# Altium PCB Fluxus.PcbDoc
Units mil, origin at the board's own origin, x right, y up, seen from the top; angles counter-clockwise.
Board outline 1181.1 x 1102.36 mil, 2 copper layers (Top Layer, Bottom Layer), stack 62.2 mil thick; 36 components, 29 nets, 141 pads, 41 vias.
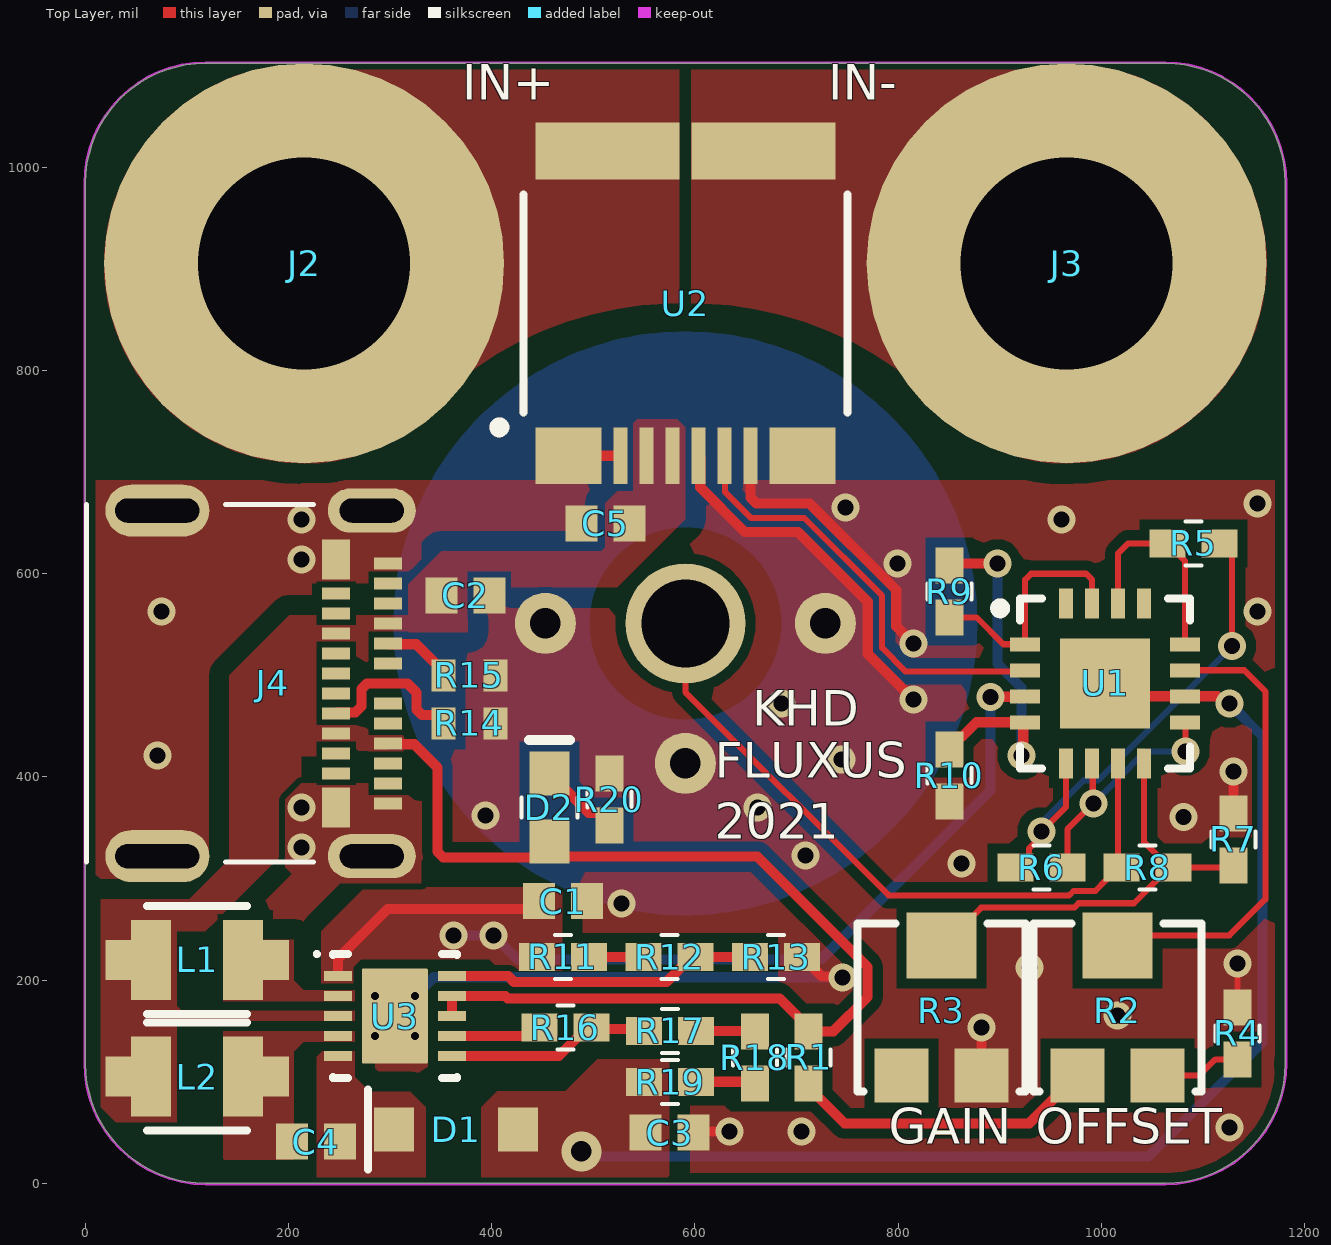
[diagram p0: Top Layer view]
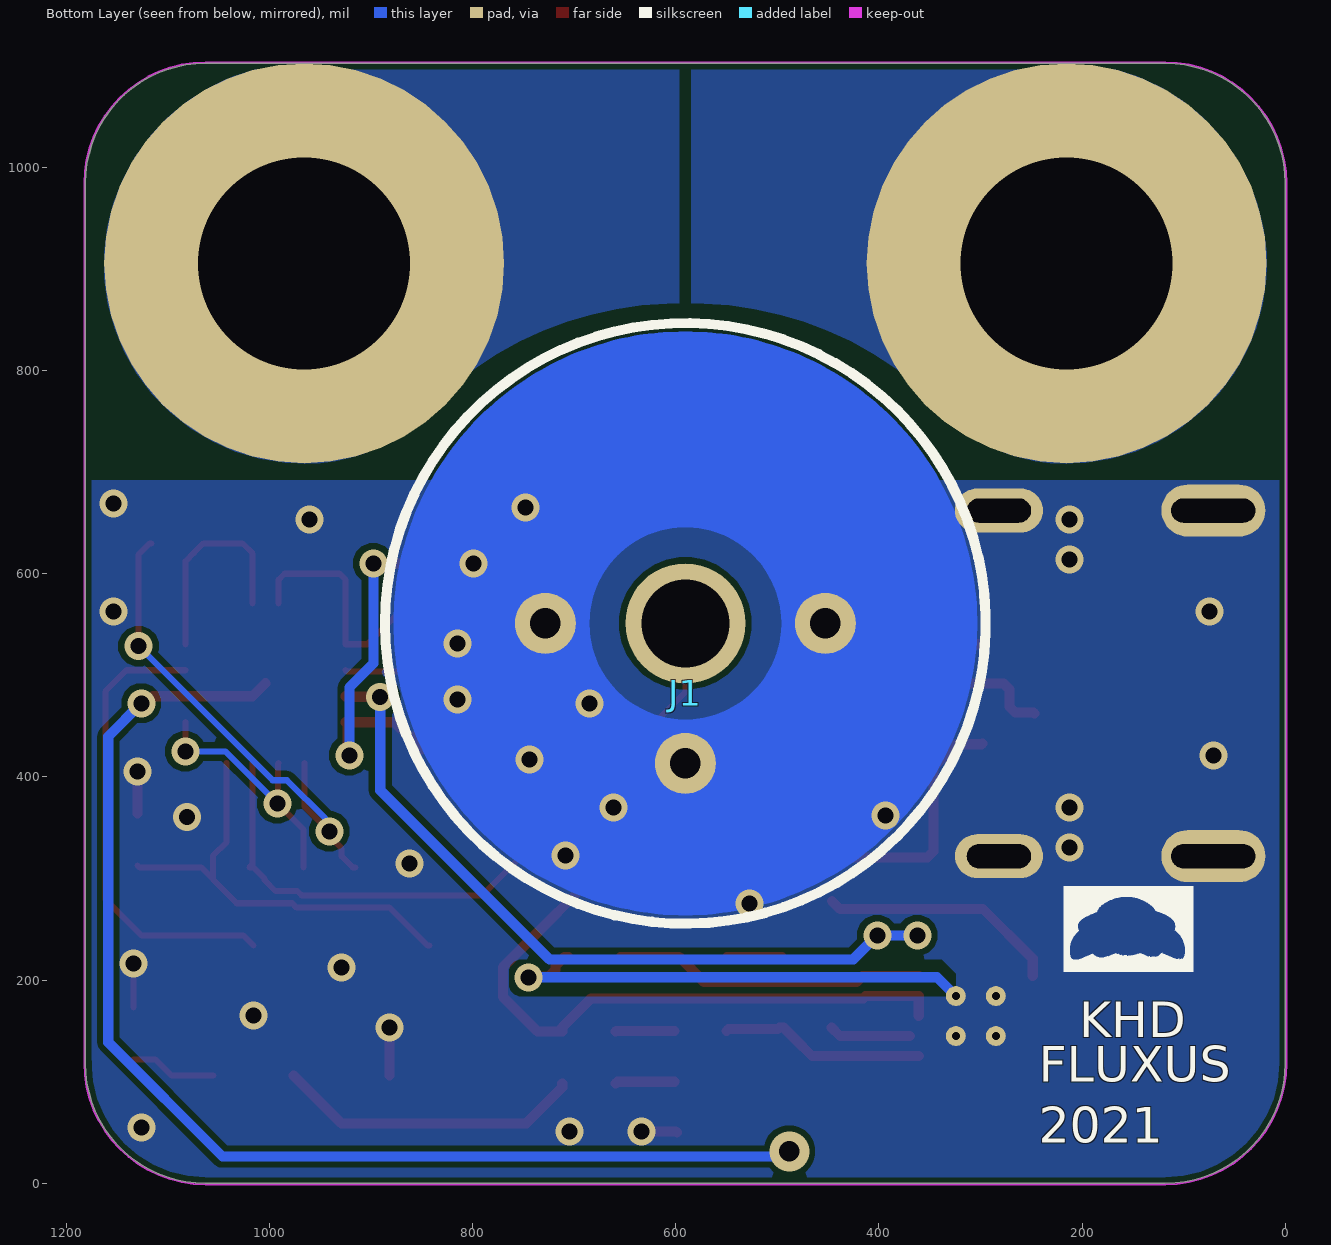
[diagram p1: Bottom Layer view, seen from below]
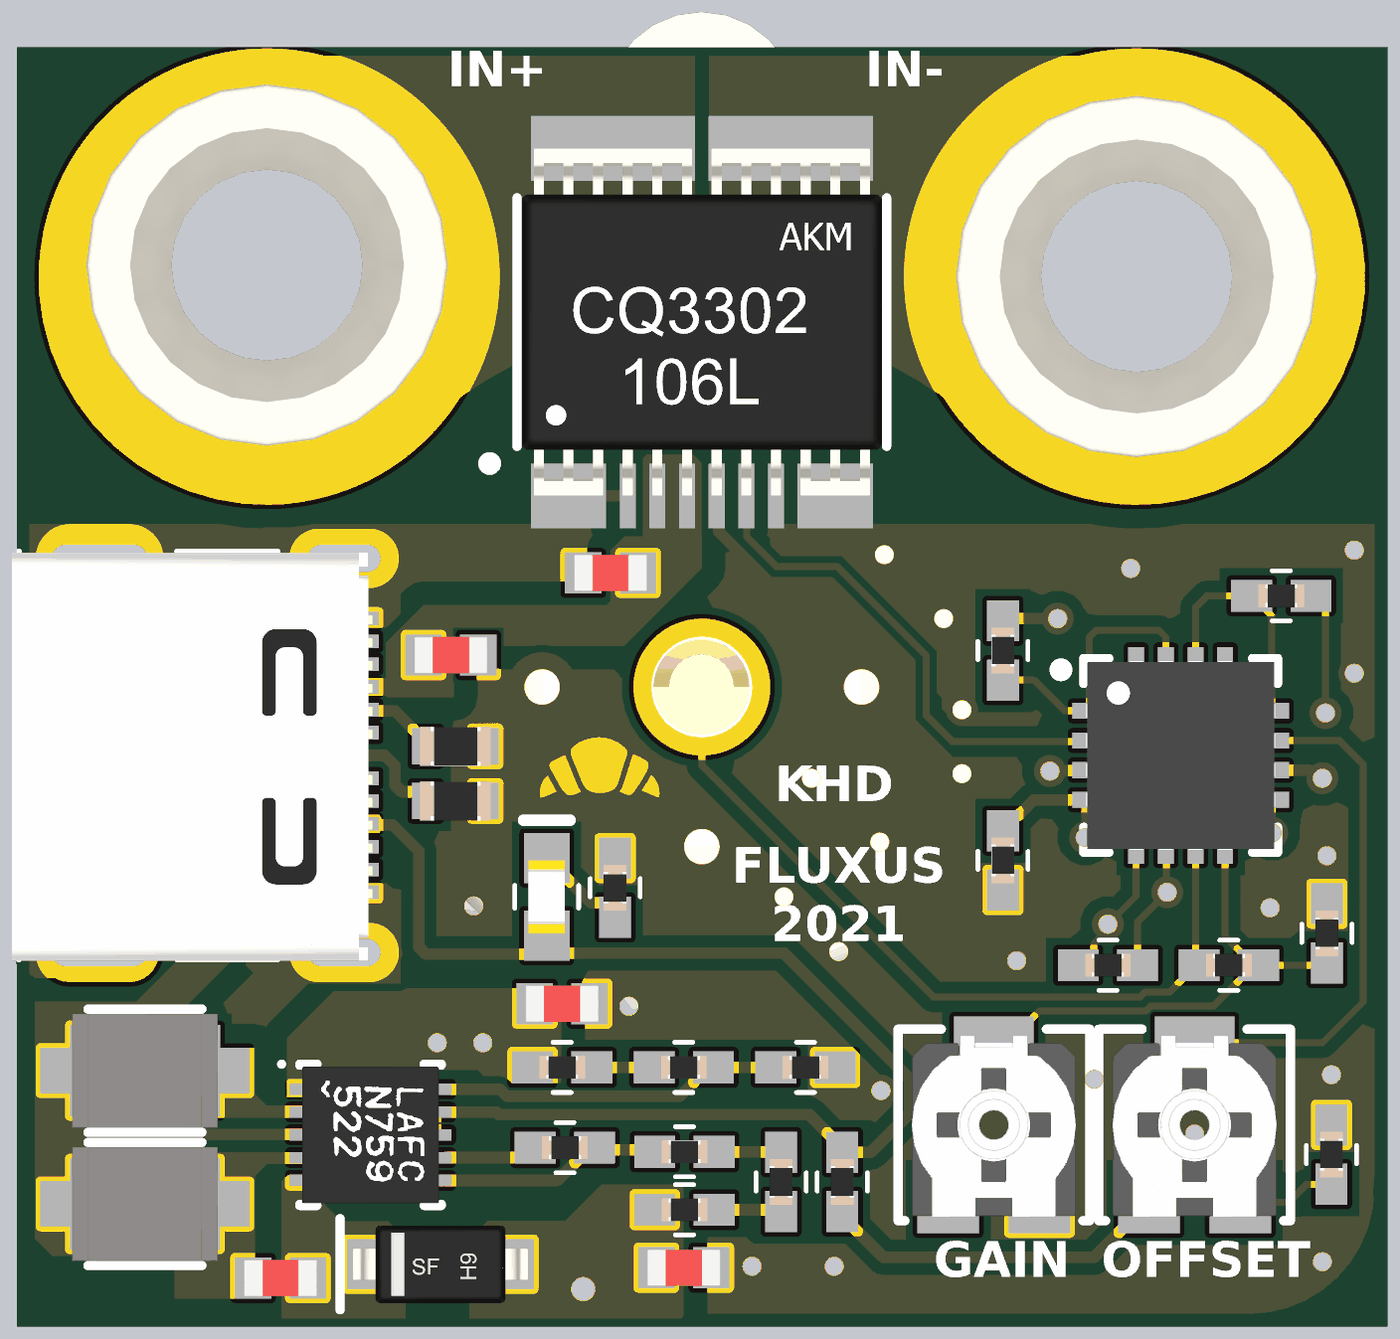
[diagram p2: 3D render of the assembled board from above, using the file's embedded part models]

## Layer stack, top to bottom
Top Solder: solder mask 0.4, Solder Resist, Dk 3.5
Top Layer: signal copper 1.4
Dielectric 1: dielectric 59.4, FR-4, Dk 4.8
Bottom Layer: signal copper 1.4
Bottom Solder: solder mask 0.4, Solder Resist, Dk 3.5

## Board outline
1062.99,0 ccw(c1062.99,118.11) 1181.1,118.11 1181.1,984.25 ccw(c1062.99,984.25) 1062.99,1102.36 118.11,1102.36 ccw(c118.11,984.25) 0,984.25 0,118.11 ccw(c118.11,118.11) 118.11,0

## Design rules (kind name [scope] priority, off if disabled: settings)
Clearance Clearance_1 [InNamedPolygon('GND_TOP')] p1: gap=10 ignorepadtopadclearanceinfootprint=FALSE except(0: Arc-Hole Track-Hole SMDPad-Hole THPad-Hole Via-Hole Fill-Hole Poly-Hole Region-Hole Text-Hole; 20: Fill-Fill Fill-Poly Fill-Region Poly-Poly Poly-Region Region-Region)
Clearance [All] p2: gap=6 ignorepadtopadclearanceinfootprint=TRUE
Height [All] p1 off: minheight=0 maxheight=1000 prefheight=500
MinimumSolderMaskSliver [All] p1 off: minsoldermaskwidth=10
PlaneClearance [InNamedPolygon('GND_TOP')] p1: clearance=20
PolygonConnect PolygonConnect_1 [All vs IsNamedPolygon('GND_TOP')] p1: connectstyle=Direct reliefconductorwidth=10 reliefentries=4 polygonreliefangle="90 Angle" airgapwidth=10
PolygonConnect [All] p2: connectstyle=Direct reliefconductorwidth=10 reliefentries=4 polygonreliefangle="90 Angle" airgapwidth=10
RoutingVias [All] p1: holewidth=20.12 width=39.37 viastyle="Through Hole" minholewidth=15.75 minwidth=27.56 maxholewidth=28 maxwidth=50
SolderMaskExpansion [All] p1: expansion=4 istentingtop=FALSE
Width [All] p1: maxlimit=393.7 minlimit=6 preferedwidth=10
27 further rules are at their usual default settings.

## Components (designator, comment, footprint, x,y, rotation, side; value= is the part's Value field where it differs from the comment)
C1 "C0603 0.47uF 50V X7R" C0603-HIGH-DENSITY 470,277.87 r180 top value=0.47uF
C2 "C0603 1uF 25V X7R" C0603-HIGH-DENSITY 374.02,578.74 r180 top value=1uF
C3 "C0603 0.47uF 50V X7R" C0603-HIGH-DENSITY 575,50 r180 top value=0.47uF
C4 "C0603 100nF 50V X7R" C0603-HIGH-DENSITY 227,41 r0 top value=100nF
C5 "C0603 0.47uF 50V X7R" C0603-HIGH-DENSITY 511.81,649.61 r0 top value=0.47uF
D1 "B0540WQ-7-F" SOD123W 365,53 r0 top
D2 "LED 0603 Green" LED0603-IPC 456.69,370.08 r270 top
J1 "112420" "BNC_Plug, Male Pin Panel Mount" 590.55,551.18 r90 bottom locked
J2 "IN+" "Banana Jack"#1 215.35,915.35 r180 top
J3 "IN-" "Banana Jack"#2 965.75,905.51 r180 top
J4 "USB C" "Molex USB-C" 149.61,492.13 r270 top locked
L1 "LQH32CN100K33L" "LQH32C L1210" 110,220 r0 top value=10uH
L2 "LQH32CN100K33L" "LQH32C L1210" 110,105 r0 top value=10uH
R1 "R0402 10k 1%" R0402-IPC 711.79,124 r90 top value=10k
R2 "OFFSET" POT3.25-2 1015.75,169.29 r90 top value=2k
R3 "GAIN" POT3.25-2 842.52,169.29 r90 top value=2k
R4 "R0402 10k 1%" R0402-IPC 1133.86,147.64 r270 top value=10k
R5 "R0402 10k 1%" R0402-IPC 1090.55,629.92 r0 top value=10k
R6 "R0402 10k 1%" R0402-IPC 940.94,311.02 r180 top value=10k
R7 "R0402 1k 1%" R0402-IPC 1129.92,338.58 r270 top value=1k
R8 "R0402 10k 1%" R0402-IPC 1045.28,311.02 r180 top value=10k
R9 "R0402 10k 1%" R0402-IPC 850.39,582.68 r90 top value=10k
R10 "R0402 10k 1%" R0402-IPC 850.39,401.57 r270 top value=10k
R11 "R0402 10k 1%" R0402-IPC 470,222.87 r180 top value=10k
R12 "R0402 1k 1%" R0402-IPC 575,222.87 r180 top value=1k
R13 "R0402 1k 1%" R0402-IPC 680,222.87 r180 top value=1k
R14 "R0603 5.1K 1%" R0603-HIGH-DENSITY 377.95,452.76 r180 top value=5.1k
R15 "R0603 5.1K 1%" R0603-HIGH-DENSITY 377.95,500 r180 top value=5.1k
R16 "R0402 1k 1%" R0402-IPC 472.44,153.54 r180 top value=1k
R17 "R0402 1k 1%" R0402-IPC 575.59,150 r180 top value=1k
R18 "R0402 1k 1%" R0402-IPC 659,124 r90 top value=1k
R19 "R0402 10k 1%" R0402-IPC 575.59,100 r180 top value=10k
R20 "R0402 1k 1%" R0402-IPC 515.75,377.95 r270 top value=1k
U1 "ADA4610-4ACPZ-R7" "LFCSP16 4x4x0.75mm" 1003.74,492.2 r0 top
U2 "CQ3302" "24-LSSOP CQ3302 Specific" 590.55,866.14 r90 top
U3 "LT3463EDD#PBF" DFN-10 304.69,164.69 r0 top

## Footprints (in the part's own frame and the unit in brackets; to place one, negate y for a bottom-side part, rotate by r counter-clockwise, add the part's x,y. Pads: shape width x height; smd on the part's side, far side on the other; paste and mask are expansions set on the pad)
"24-LSSOP CQ3302 Specific" [mm] "24-LSSOP, 10-Leads, Body 7.90x5.60mm, Pitch 0.65mm"
  rect 1.42x1.65 smd paste+0 mask+0: 1(-3.81,2.925) 8(-3.81,-2.925)
  rect 1.42x0.35 smd paste+0 mask+0: 2(-3.81,1.625) 3(-3.81,0.975) 4(-3.81,0.325) 5(-3.81,-0.325) 6(-3.81,-0.975) 7(-3.81,-1.625)
  rect 1.42x3.6 smd paste+0 mask+0: 9(3.81,-1.95) 10(3.81,1.95)
  silkscreen extent -3.22,-4.05 2.73,4.77, body extent -3.8,-3.95 3.8,3.95, height 1.4
"Banana Jack"#1 [mm] "JACK NON-INSULATED .350\""
  round 10 hole 5.3: 1(0,0.25)
  body extent -3.96,-3.96 3.96,3.96, height 2.37
"Banana Jack"#2 [mm] "JACK NON-INSULATED .350\""
  round 10 hole 5.3: 1(0,0)
  body extent -3.96,-3.96 3.96,3.96, height 2.37
"BNC_Plug, Male Pin Panel Mount" [mil] "BNC Connector Plug, Male Pin 50Ohm Panel Mount Solder Cup"
  round 118.11 hole 86.61: C(0,0)
  round 60 hole 30 mask+4: G(-137.8,0) G(-0.01,-137.8) G(0,137.8)
  Top Layer circle w192.91: c0,0 r190.94
  silkscreen extent -296,-295 296,296, body extent -289,-285 583,284, height 1016
C0603-HIGH-DENSITY [mm] "Chip Capacitor, 2-Leads, Body 1.60x0.80mm, IPC High Density"
  rect 0.8x0.9 smd: 1(-0.6,0) 2(0.6,0)
  body extent -0.8,-0.4 0.8,0.4, height 0.3
DFN-10 [mm] "10-LEAD (3mm × 3mm) PLASTIC DFN (10-WFDFN)"
  rect 0.7x0.25 smd mask+0.102: 1(-1.425,1) 2(-1.425,0.5) 3(-1.425,0) 4(-1.425,-0.5) 5(-1.425,-1) 6(1.425,-1) 7(1.425,-0.5) 8(1.425,0) 9(1.425,0.5) 10(1.425,1)
  round 0.5 hole 0.2: 11(-0.5,-0.5) 11(-0.5,0.5) 11(-0.5,0.5) 11(0.5,-0.5) 11(0.5,0.5)
  rrect5% 1.65x2.38 smd mask+0.102: 11(0,0)
  silkscreen extent -2,-1.55 1.55,1.6, body extent -1.5,-1.5 1.5,1.5, height 0.75
LED0603-IPC [mm]
  rect 1.1x1 smd: A(0.85,0) K(-0.85,0)
  silkscreen extent -1.68,-0.7 0.25,0.7, body extent -0.8,-0.4 0.8,0.4, height 1.1
"LFCSP16 4x4x0.75mm" [mm] "16-Lead Lead Frame Chip Scale Package"
  rect 0.75x0.35 smd: 1(-2,0.975) 2(-2,0.325) 3(-2,-0.325) 4(-2,-0.975) 9(2,-0.975) 10(2,-0.325) 11(2,0.325) 12(2,0.975)
  rect 0.35x0.75 smd: 5(-0.975,-2) 6(-0.325,-2) 7(0.325,-2) 8(0.975,-2) 13(0.975,2) 14(0.325,2) 15(-0.325,2) 16(-0.975,2)
  rect 2.25x2.25 smd paste-1.3: 17(0,0)
  silkscreen extent -2.75,-2.12 2.12,2.12, body extent -2.07,-2.07 2.07,2.07, height 0.8
"LQH32C L1210" [mm] "Murata LQH32C Series Inductors"
  rect 0.65x1 smd: 1(-1.97,0) 2(1.97,0)
  rect 1x2 smd: 1(-1.15,0) 2(1.15,0)
  silkscreen extent -1.25,-1.35 1.25,1.35, body extent -1.6,-1.25 1.6,1.25, height 2.2
"Molex USB-C" [mm] "MOLEX_105450-0101"
  rect 0.3x0.7 smd: A1(-3,3.77) A2(-2.5,3.77) A3(-2,3.77) A4(-1.5,3.77) A5(-1,3.77) A6(-0.5,3.77) A7(0.5,3.77) A8(1,3.77) A9(1.5,3.77) A10(2,3.77) A11(2.5,3.77) A12(3,3.77) B2(2.25,2.47) B3(1.75,2.47) B4(1.25,2.47) B5(0.75,2.47) B6(0.25,2.47) B7(-0.25,2.47) B8(-0.75,2.47) B9(-1.25,2.47) B10(-1.75,2.47) B11(-2.25,2.47)
  rect 1x0.7 smd: B1(3.1,2.47) B12(-3.1,2.47)
  oval 1.1x2.2 hole 0.6 slot 1.6 at 90 deg: S1(-4.32,3.36) S2(4.32,3.36)
  oval 1.3x2.6 hole 0.6 slot 2.1 at 90 deg: S3(-4.32,-2) S4(4.32,-2)
  silkscreen extent -4.47,-3.77 4.47,1.9, body extent -4.44,-3.92 4.5,3.98, height 3.22
POT3.25-2 [mm] "Surface Mount Potentiometer"
  rect 1.35x1.35 smd: 1(-1.6,1) 3(-1.6,-1)
  rect 1.65x1.75 smd: 2(1.65,0)
  silkscreen extent -2,-2.1 2.2,2.1, body extent -1.91,-1.8 2.05,1.8, height 1.13
R0402-IPC [mm]
  rect 0.9x0.7 smd: 1(-0.65,0) 2(0.65,0)
  silkscreen extent -0.2,-0.55 0.2,0.55, body extent -0.5,-0.25 0.5,0.26, height 0.34
R0603-HIGH-DENSITY [mm] "Chip Resistor, 2-Leads, Body 1.60x0.80mm, IPC High Density"
  rect 0.6x0.8 smd: 1(-0.65,0) 2(0.65,0)
  body extent -0.77,-0.43 0.78,0.43, height 0.44
SOD123W [mm] "SODFL, 2-Leads, Body 1.70x3.50mm, IPC Medium Density"
  rect 1x1.1 smd: 1(-1.55,0) 2(1.55,0)
  silkscreen extent -2.2,-1 -2.2,1, body extent -1.93,-0.85 1.92,0.85, height 1.35

## Part data
C1 C3 C5: "Chip Capacitor, 0603, 0.47uF, 50V, X7R", Max. Voltage=50V, Supplier Part Number 1=445-172485-1-ND, EIA Code=X7R, Features="Soft Termination", Supplier 1=Digi-Key
C2: "CAP CER 1UF 25V X7R 0603", Max. Voltage=25V, Supplier Part Number 1=445-173615-1-ND, EIA Code=X7R, Features="Soft Termination", Supplier 1=Digi-Key
C4: "CAP CER 0.1UF 50V X7R 0603", Max. Voltage=50V, Ratings=AEC-Q200, Supplier Part Number 1=490-5798-1-ND, EIA Code=X7R, Features="Soft Termination", Supplier 1=Digi-Key
D1: "DIODE SCHOTTKY 40V 500MA SOD123", Supplier Part Number 1=B0540WQ-7-FDICT-ND, Manufacturer Part No=B0540WQ-7-F, Supplier 1=Digi-Key, Supplier 2=Mouser, Supplier 3=LCSC, Supplier Part Number 2=621-B0540WQ-7-F, Supplier Part Number 3=C460776
D2: "LED GREEN CLEAR 0603 SMD", Supplier Part Number 1=732-4971-1-ND, Supplier 1=Digi-Key
J1: library part BNC, "BNC Connector Plug, Male Pin 50Ohm Panel Mount Solder Cup", Supplier Part Number 1=ACX1407-ND, Supplier 1=Digi-Key, Supplier 2=Mouser, Supplier Part Number 2=523-112420
J2 J3: library part "Banana Jack", "JACK NON-INSULATED .350\"", Supplier Part Number 1=36-575-8-ND, Supplier 1=Digi-Key
J4: "USB-C USB 3.1 Gen 2, Superspeed+_ Receptacle Connector 24 Position Surface Mount, Right Angle; Through Hole", Package=None, Supplier Part Number 1=WM12856CT-ND, Digi-Key_Part_Number=WM12856CT-ND, Digi-Key_Purchase_URL=https://www.digikey.tw/product-detail/en/molex/1054500101/WM12856CT-ND/5843891?utm_source=snapeda&utm_medium=aggregator&utm_campaign=symbol, MF=Molex, MP=1054500101, SnapEDA_Link=https://www.snapeda.com/parts/1054500101/Molex/view-part/448528/?ref=snap, Supplier 1=Digi-Key, Supplier 2=Mouser, Supplier 3=LCSC, Supplier Part Number 2=538-105450-0101, Supplier Part Number 3=C134092
L1 L2: "FIXED IND 10UH 450MA 390 MOHM, UNSHIELDED WIREWOUND", Saturation Current="450 mA", Supplier Part Number 1=490-6614-1-ND, Supplier 1=Digi-Key, Supplier 2=Mouser, Supplier 3=LCSC, Supplier Part Number 2=81-LQH32CN100K33L, Supplier Part Number 3=C86069
R1 R4 R5 R6 R8 R9 R10 R11 R19: "Chip Resistor, 0402, 10k ohms, 1%, 1/16 W", Supplier Part Number 1=311-10.0KLRCT-ND, Supplier 1=Digi-Key
R2 R3: library part RPot, "Surface Mount Trimmer", Supplier Part Number 1=TC33X-202ECT-ND, Supplier 1=Digi-Key, Supplier 2=Mouser, Supplier 3=LCSC, Supplier Part Number 2=652-TC33X-2-202E, Supplier Part Number 3=C720647
R7 R12 R13 R16 R17 R18 R20: "Chip Resistor, 0402, 1k ohms, 1%, 1/16 W", Supplier Part Number 1=311-1.00KLRCT-ND, Supplier 1=Digi-Key
R14 R15: "RES SMD 5.1K OHM 1% 1/10W 0603", Operating Temperature="-55°C ~ 155°C", Supplier Part Number 1=RMCF0603FT5K10CT-ND, Temperature Coefficient=±100ppm/°C, Features="Automotive AEC-Q200", Supplier 1=Digi-Key
U1: "IC OPAMP JFET 4 CIRCUIT 16LFCSP", Supplier Part Number 1=ADA4610-4ACPZ-R7CT-ND, Supplier 1=Digi-Key, Supplier 2=Mouser, Supplier 3=LCSC, Supplier Part Number 2=584-ADA4610-4ACPZ-R7, Supplier Part Number 3=C654151
U2: "Current Sensor 21A Channel Hall Effect, Open Loop Bidirectional 24-LSSOP (0.220\", 5.60mm Width), 10 Leads", Supplier Part Number 1=974-1088-1-ND, Supplier 1=Digi-Key, Supplier 3=LCSC, Supplier Part Number 3=C133176
U3: library part LT3463EDD, "Dual Micropower DC/DC Converters with Schottky Diodes, 2.4 to 15 V Vin, 10-pin SON (DD-10), -40 to 85 degC, Pb-Free", Manufacturer="Linear Technology", Supplier Part Number 1=LT3463EDD#PBF-ND, Code_JEDEC=MO-229, ComponentLink1Description="Manufacturer URL", ComponentLink1URL=http://www.linear.com/, ComponentLink2Description=Datasheet, ComponentLink2URL=http://cds.linear.com/docs/en/datasheet/3463f.pdf, ComponentLink3Description="Package Specification", ComponentLink3URL=http://cds.linear.com/docs/en/packaging/DFN_10_05-08-1699.pdf, Manufacturer Part Number=LT3463EDD#PBF, Mounting Technology="Surface Mount", Number of Outputs=2, PackageDescription="10-Pin Plastic DFN, Body 3 x 3 mm, Pitch 0.5 mm", PackageReference=DD-10, PackageVersion="Rev. C, 06/2010", PartNumber=LT3463EDD#PBF, RoHS=TRUE, Supplier 1=Digi-Key, Supplier 2=Mouser, Supplier Part Number 2=584-LT3463EDD#PBF, Vin Max(V)=15, Vin Min(V)=2.4

## Via types
v1: diameter 27.56, hole 15.75, Top Layer to Bottom Layer, tented both sides, 40 vias
v2: diameter 39.37, hole 20.12, Top Layer to Bottom Layer, tented both sides, 1 vias

## Nets (pads, with @x,y where several pads share a name; then routed paths per layer and width w, separated by ;. In a path a pad name is that pad's centre, name@x,y a point inside that pad or via, vN(x,y) a via of type N, cw(c..) or ccw(c..) an arc to the next point about the centre after c; other vN are vias at no path point)
+5: C2.2 C5.2 D2.A J4.A4 J4.A9 J4.B4 J4.B9 L1.1 L2.1 R1.2 U2.3 U2.4 U3.3 U3.8 U3.9 | length 1113.7
  Top Layer w10: J4.A9 298.94,432.17 323.74,432.17 346.46,409.45 346.46,326.63 352.31,320.77 442.01,320.77 456.69,335.46 D2.A ; U3.8 U3.9 413.23,184.37 415.51,182.09 683.22,182.09 711.79,153.53 R1.2 736.2,149.59 769.89,183.27 769.89,213.08 661.34,321.63 469.71,321.63 D2.A@456.69,334.65
+15: C1.2 R11.2 U1.3 U3.1 | length 971.8
  Top Layer w10: U3.1 248.58,221.02 297.56,270 438.5,270 C1.2 ; v1(890.89,478.62) 891.29,479.01 924.6,479.01 U1.3
  Bottom Layer w10: v1(362.2,244.09) v1(401.57,244.09) 425.2,220.47 724.41,220.47 890.89,386.96 v1(890.89,478.62)
-15: C3.2 D1.2 R19.2 U1.10 U1.17 | length 1196.6
  Top Layer w10: U1.17 1016.54,479.41 U1.10 1114.26,479.41 1121.23,472.44 v1(1125.98,472.44)
  Bottom Layer w10: v2(488.19,31.5) 493.28,26.4 575.49,26.4 1046.09,26.4 1158.64,138.95 1158.64,439.79 v1(1125.98,472.44)
GND: C1.1 C2.1 C3.1 C5.1 J1.G J4.A1 J4.A12 J4.B1 J4.B12 J4.S1 J4.S2 J4.S3 J4.S4 R3.3 R4.1 R7.1 R10.2 R13.1 R14.1 R15.1 R20.1 U2.1 U2.2 U2.5 U2.7 U2.8 U3.11 | length 1337.1
  Top Layer w6: R4.1 v1(1133.86,216.54)
  Top Layer w10: U2.1 U2.2 ; C3.1 599.8,51.18 v1(633.86,51.18) ; U2.5 605.24,714.25 605.24,685 649.24,641 701.52,641 770.15,572.37 770.15,521.19 v1(814.96,476.38) ; U2.7 654.53,675.31 660.83,669 713.12,669 798.15,583.96 798.15,548.3 v1(814.96,531.5) ; R13.1 709.53,222.87 718.31,214.09 718.31,210.16 725.03,203.44 744.49,203.44 v1(745.11,202.82) ; R3.3 v1(881.89,153.54) ; R7.1 v1(1129.92,405.51)
  Bottom Layer w10: U3.11@324.37,184.37 342.82,202.82 v1(745.11,202.82)
  other v1: 704.72,51.18 1125.98,55.12 1015.75,165.35 929.13,212.6 527.56,275.59 862.2,314.96 708.66,322.83 212.6,330.71 1080.84,360.61 393.7,362.2 212.6,370.08 661.42,370.08 744.09,417.32 70.87,421.26 685.04,472.44 74.8,562.99 1153.54,562.99 799.21,610.24 212.6,614.17 212.6,653.54 960.63,653.54 748.03,665.35 1153.54,669.29
NetC4_2: C4.2 D1.1 U3.5
NetD2_K: D2.K R20.2 | length 83.5
  Top Layer w10: D2.K 456.69,401.57 471.38,386.89 473.35,386.89 495.46,364.78 506.97,364.78 515.75,356 R20.2
NetJ1_C: J1.C R8.2 U1.7 | length 695.7
  Top Layer w6: J1.C 590.55,483.49 790.57,283.46 968.33,283.46 972.6,287.73 994,287.73 1004.97,298.7 1004.97,300.24 1015.75,311.02 R8.2 1017.72,312.99 1016.54,314.17 U1.7
NetJ2_1: J2.1 U2.10
NetJ3_1: J3.1 U2.9
NetJ4_A5: J4.A5 R15.2 | length 69.7
  Top Layer w10: J4.A5 298.94,530.59 325.71,530.59 352.36,503.94 R15.2
NetJ4_B5: J4.B5 R14.2 | length 154.4
  Top Layer w10: J4.B5 247.76,463.5 265.8,463.5 271.65,469.36 271.65,486.27 277.51,492.13 316.93,492.13 325.79,483.27 325.79,466.67 331.65,460.81 345.55,460.81 352.36,454 R14.2
NetL1_2: L1.2 U3.2
NetR1_1: R1.1 R2.1 | length 302.8
  Top Layer w10: R1.1 711.79,94.47 747.2,59.06 929.13,59.06 R2.1
NetR2_2: R2.2 U1.11 | length 456.7
  Top Layer w6: R2.2 1025.59,244.09 1125.98,244.09 1161.42,279.53 1161.42,484.25 1140.67,505 U1.11
NetR2_3: R2.3 R4.2 | length 85.3
  Top Layer w6: R2.3 1096.46,106.3 1112.2,122.05 R4.2
NetR3_2: R3.2 R7.2 R8.1 U1.8 | length 439.6
  Top Layer w6: R3.2 844.49,234.25 881.7,271.46 973.3,271.46 977.57,275.73 1032.14,275.73 1055.65,299.24 R8.1@1055.65,299.74 ; U1.8 1042.13,335.83 1055.65,322.3 R8.1@1055.65,299.74 ; R7.2 1127.95,311.02 1066.93,311.02 R8.1@1055.65,299.74
NetR5_1: R5.1 U1.12 U1.14 | length 208.2
  Top Layer w6: U1.14 1016.54,620.02 1026.43,629.92 R5.1 1074.38,620.5 1082.48,612.4 U1.12
NetR5_2: R5.2 R6.2 U1.5 | length 500.5
  Top Layer w6: R6.2 918.06,311.02 928.84,321.8 928.84,329.77 936.82,337.75 936.82,342.33 965.35,370.87 U1.5 ; R5.2 1117.94,629.92 1128.72,619.14 v1(1128.72,528.72)
  Bottom Layer w6: v1(940.94,346.46) 945.07,350.58 945.07,359.17 982.69,396.8 996.79,396.8 v1(1128.72,528.72)
NetR6_1: R6.1 U1.6 U1.9 | length 254
  Top Layer w6: R6.1 966.54,348.43 v1(992.13,374.02) 991.54,374.61 991.54,412.87 U1.6 ; U1.9 1082.68,453.62 v1(1082.68,425.2)
  Bottom Layer w6: v1(992.13,374.02) 1013.97,395.86 1043.31,425.2 v1(1082.68,425.2)
NetR9_1: R9.1 U1.1 U1.15 | length 239.2
  Top Layer w6: R9.1@854.33,557.09 877.11,557.09 903.61,530.59 U1.1 925,594.14 930.86,600 985.09,600 990.94,594.14 U1.15
NetR9_2: R9.2 R10.1 U1.4 | length 368.9
  Top Layer w10: R10.1 850.39,431.1 859.17,439.88 863.11,439.88 877.05,453.82 U1.4 923.13,451.95 923.13,423.13 v1(921.26,421.26) ; R9.2 852.36,610.24 v1(897.64,610.24)
  Bottom Layer w10: v1(897.64,610.24) 897.64,511.7 921.26,488.08 v1(921.26,421.26)
NetR11_1: R11.1 R12.2 | length 53.8
  Top Layer w10: R11.1 R12.2
NetR12_1: R12.1 R13.2 U3.10 | length 306.4
  Top Layer w10: U3.10 416.18,204.06 422.14,198.09 571.87,198.09 596.65,222.87 R13.2
NetR16_1: R16.1 R17.2 U3.6 | length 202.4
  Top Layer w10: U3.6 465.87,125.31 483.46,142.91 494.09,153.54 R16.1 499.8,151.77 548.23,151.77 R17.2
NetR16_2: R16.2 U3.7 | length 80.8
  Top Layer w10: U3.7@369.57,145.08 438.39,145.08 R16.2
NetR17_1: R17.1 R18.2 | length 58
  Top Layer w10: R17.1 658.59,150 R18.2
NetR18_1: R18.1 R19.1 | length 58.5
  Top Layer w10: R19.1 657.41,100 R18.1
NetU1_2: U1.2 U2.6 | length 434.9
  Top Layer w6: U2.6 629.43,715.65 629.43,680.61 655.03,655 707.32,655 784.15,578.17 784.15,526.98 807.2,503.94 923.94,503.94 U1.2
SW2: C4.1 L2.2 U3.4
pads on no net: J4.A2 J4.A3 J4.A6 J4.A7 J4.A8 J4.A10 J4.A11 J4.B2 J4.B3 J4.B6 J4.B7 J4.B8 J4.B10 J4.B11 R3.1 U1.13 U1.16

## Polygon pours and split planes (outlines as drawn)
GND on Top Layer "GND_TOP" (solid, remove dead copper, pour order 19): 1062.99,0 ccw(c1062.99,118.11) 1181.1,118.11 1181.1,691.95 0,691.95 0,118.11 ccw(c118.11,118.11) 118.11,0
GND on Top Layer "NONET_L-01_P-001" (solid, pour order 0): 330.71,295.28 330.71,370.08 307.09,393.7 212.6,393.7 196.85,377.95 196.85,311.02 212.6,295.28
GND on Top Layer "NONET_L-01_P-001" (solid, pour order 18): 330.71,688.98 330.71,614.17 307.09,590.55 212.6,590.55 196.85,606.3 196.85,673.23 212.6,688.98
+5 on Top Layer "NONET_L-01_P-001" (solid, remove dead copper, pour order 17): 15,250 15,279.53 102.36,279.53 141.73,318.9 141.73,500 200.79,559.06 287.4,559.06 350.39,622.05 507.87,622.05 511.81,625.98 511.81,669.29 523.62,681.1 539.37,681.1 539.37,748.03 543.31,751.97 582.68,751.97 590.55,744.09 590.55,653.54 523.62,586.61 376.62,586.61 376.62,542.32 318.9,542.32 318.9,421.26 212.6,420.29 212.6,342.52 118.11,248.03 15,248.03
+15 on Top Layer "NONET_L-01_P-001" (solid, pour order 16): 232.28,196.85 263.78,196.85 263.78,212.6 271.65,220.47 397.64,220.47 421.26,196.85 464.57,196.85 469.38,201.67 469.38,286.52 464.57,291.34 275.59,291.34 232.28,248.03
-15 on Top Layer "NONET_L-01_P-001" (solid, pour order 14): 574.8,122.05 503.94,122.05 472.44,90.55 405.51,90.55 389.76,74.8 389.76,2.18 569.11,2.18 574.8,7.87
NetJ3_1 on Top Layer "NONET_L-01_P-001" (solid, pour order 13): 596.55,866.14 596.55,1102.36 973.91,1102.36 cw(c963.29,903.36) 1162.58,903.33 cw(c965.69,905.53) 971.96,708.73 cw(c963.92,874.64) 861.29,744.03 ccw(c596.58,518.15)
NetJ2_1 on Top Layer "NONET_L-01_P-001" (solid, pour order 10): 584.55,866.14 584.55,1102.36 207.19,1102.36 ccw(c217.81,903.36) 18.52,903.33 ccw(c215.41,905.53) 209.14,708.73 ccw(c217.18,874.64) 319.81,744.03 cw(c584.53,518.15)
+5 on Top Layer "NONET_L-01_P-001" (solid, pour order 4): 265,170 265,160 95,160 90,155 90,60 30,60 15,75 15,250 30,265 90,265 90,175 95,170
NetL1_2 on Top Layer "NONET_L-01_P-001" (solid, pour order 1): 265,190 215,190 205,200 205,240 140,240 135.6,235.6 135.6,179.45 265,179.45
SW2 on Top Layer "NONET_L-01_P-001" (solid, pour order 2): 265,139.37 215,139.37 205,129.37 205,23.24 136.76,23.24 135.6,24.4 135.6,149.92 265,149.92
NetC4_2 on Top Layer "NONET_L-01_P-001" (solid, pour order 3): 233.16,130.16 227.82,124.82 227.82,2.18 335,2.18 335,75 320,90 280,90 265,105 265,130.16
GND on Bottom Layer "GND_BOTTOM" (solid, remove dead copper, pour order 12): 1062.99,0 ccw(c1062.99,118.11) 1181.1,118.11 1181.1,691.95 0,691.95 0,118.11 ccw(c118.11,118.11) 118.11,0
NetJ3_1 on Bottom Layer "NONET_L-01_P-001" (solid, pour order 11): 596.55,866.14 596.55,1102.36 973.91,1102.36 cw(c963.29,903.36) 1162.58,903.33 cw(c965.69,905.53) 971.96,708.73 cw(c963.92,874.64) 861.29,744.03 ccw(c596.58,518.15)
NetJ2_1 on Bottom Layer "NONET_L-01_P-001" (solid, pour order 9): 584.55,866.14 584.55,1102.36 207.19,1102.36 ccw(c217.81,903.36) 18.52,903.33 ccw(c215.41,905.53) 209.14,708.73 ccw(c217.18,874.64) 319.81,744.03 cw(c584.53,518.15)

## Keep-outs
Keep-Out Layer:
  lines w1.97: -0.99,984.27 ccw(c118.11,984.25) -0.99,984.25 ; -0.99,984.27 cw(c118.11,984.25) 118.1,1103.35 ; -0.99,984.27 ccw(c0,984.25) -0.99,984.25 ; -0.99,984.25 -0.99,118.11 ccw(c118.11,118.11) 118.11,-0.99 1062.99,-0.99 ; 118.11,1103.35 ccw(c118.11,1102.36) 118.1,1103.35 ; 118.11,1103.35 ccw(c118.11,984.25) 118.1,1103.35 ; 118.11,1103.35 1062.99,1103.35 ; 1062.99,-0.99 ccw(c1062.99,118.11) 1182.09,118.08 ; 1062.99,-0.99 1062.99,-0.99 ; 1063.02,1103.35 ccw(c1062.99,984.25) 1062.99,1103.35 ; 1063.02,1103.35 cw(c1062.99,984.25) 1182.09,984.27 ; 1063.02,1103.35 ccw(c1062.99,1102.36) 1062.99,1103.35 ; 1182.09,118.08 ccw(c1181.1,118.11) 1182.09,118.11 ; 1182.09,118.08 ccw(c1062.99,118.11) 1182.09,118.11 ; 1182.09,118.11 1182.09,984.25 ; 1182.09,984.25 ccw(c1181.1,984.25) 1182.09,984.27 ; 1182.09,984.25 ccw(c1181.1,984.25) 1182.09,984.25 ; 1182.09,984.25 ccw(c1062.99,984.25) 1182.09,984.27

## Other copper
Bottom Layer:
  pour cut-out: 764,208 764,196 cw(c752.37,196) 752.37,184.37 324.37,184.37 324.37,206.26 338.11,220 752,220 cw(c752,208)

## Silkscreen, mask and mechanical layers (free items; w line width, h text height)
Top Overlay:
  text "KHD" at 656.26,438.42 h60
  text "FLUXUS / 2021" at 619.27,327.6 h60
Bottom Overlay:
  region: 759 vertices and 1 holes, not listed, extent 90.55,208.41 217.87,292.4
  text "KHD" at 202.76,131.89 h60
  text "FLUXUS / 2021" at 242.94,28.38 h60
Top Solder:
  drawing of 5 lines, arcs and shapes, not listed
Bottom Solder:
  drawing of 5 lines, arcs and shapes, not listed